# Altium PCB bwl1.22.PcbDoc
Units mil, origin at the board's own origin, x right, y up, seen from the top; angles counter-clockwise.
Board outline 1984.5 x 4223.42 mil, 2 copper layers (Top Layer, Bottom Layer); 109 components, 70 nets, 405 pads, 74 vias.
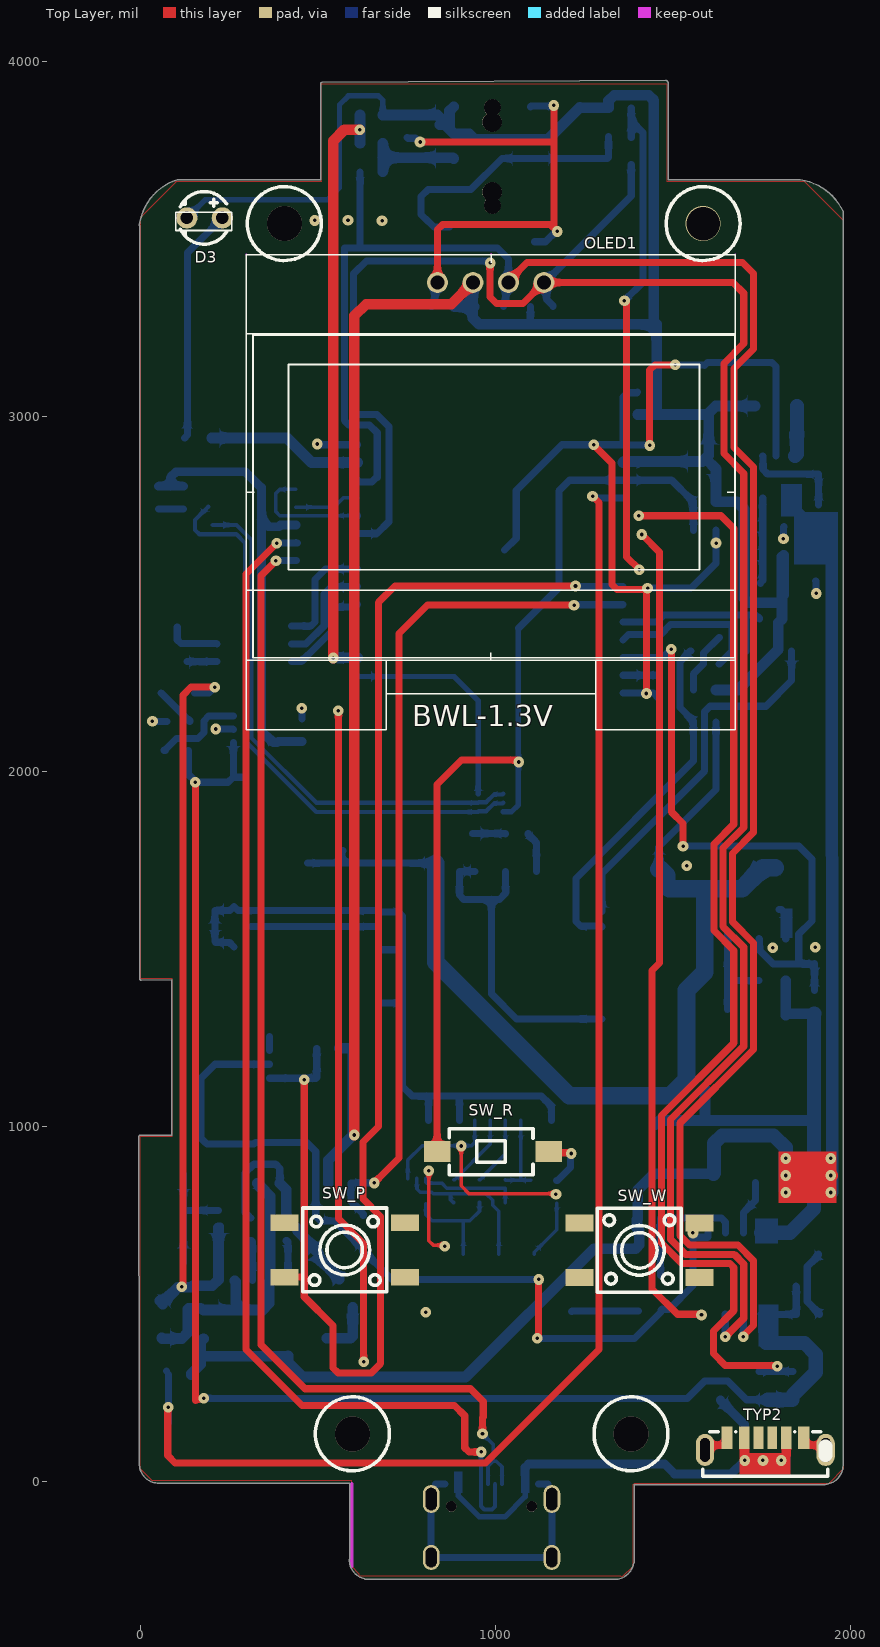
[diagram p0: Top Layer view]
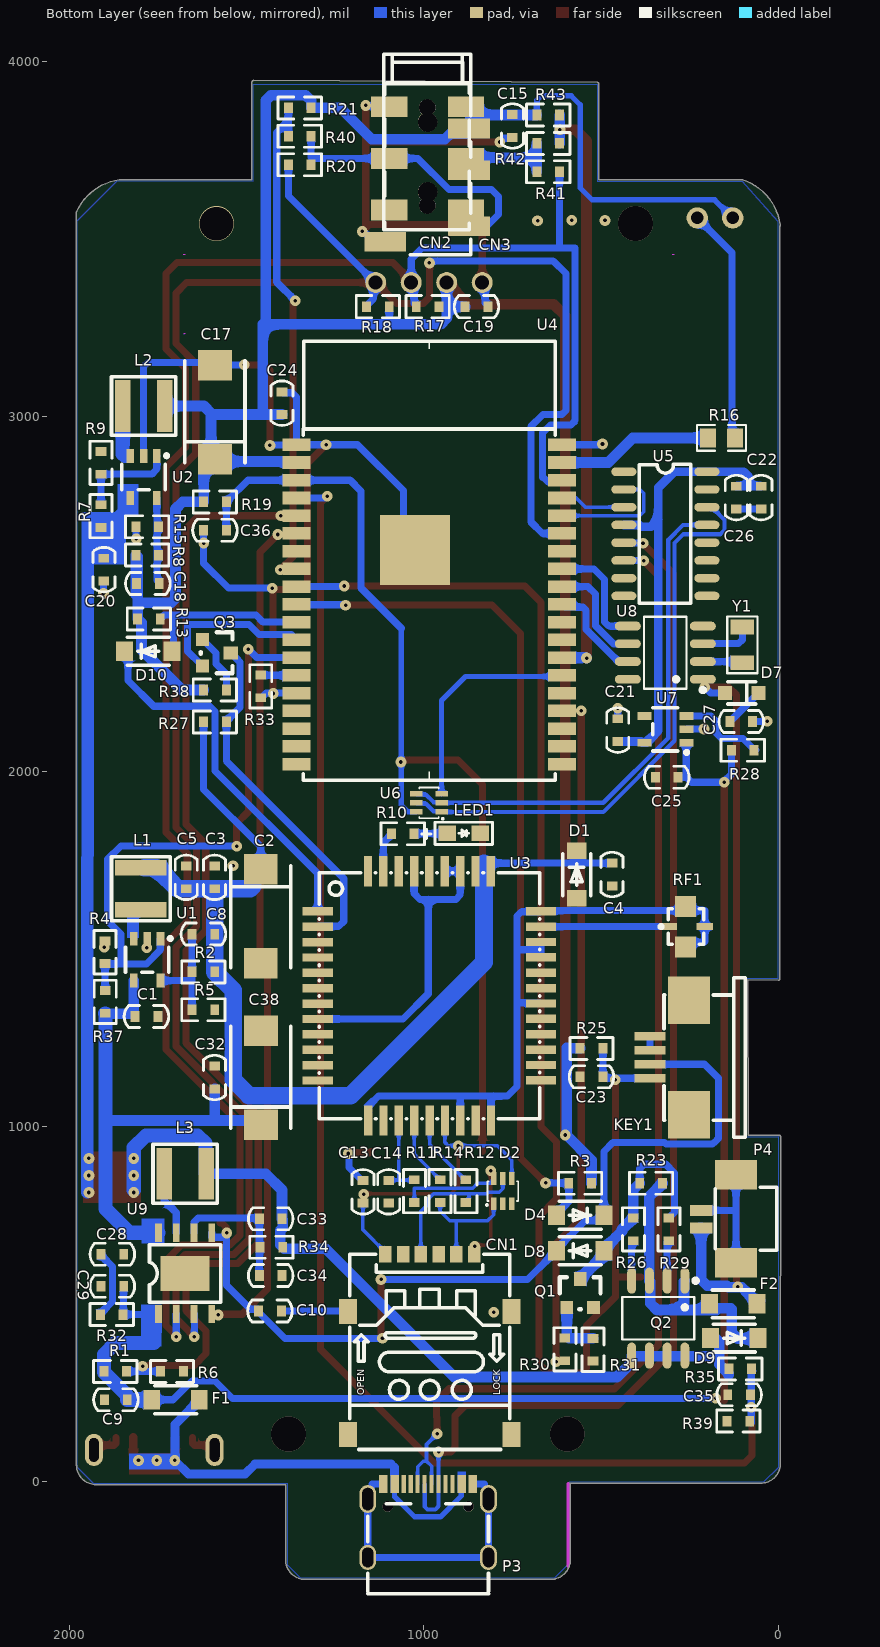
[diagram p1: Bottom Layer view, seen from below]

## Layer stack, top to bottom
Top Solder: solder mask 0.4, Solder Resist, Dk 3.5
Top Layer: signal copper 1.4
Dielectric 1: dielectric 12.6, FR-4, Dk 4.8
Bottom Layer: signal copper 1.4
Bottom Solder: solder mask 0.4, Solder Resist, Dk 3.5

## Board outline
-4.01,50 ccw(c51,50) 51,-5.01 171,-5.01 ccw(c171,0) 171.69,-4.97 588.55,-4.97 588.55,-218.68 ccw(c593,-221) 587.98,-221 ccw(c643,-221) 588.55,-228.88 588.55,-230.57 ccw(c593.57,-230.57) 589.39,-233.34 ccw(c643,-221) 630.48,-274.57 ccw(c633.94,-270.94) 633.94,-275.95 640.37,-275.95 ccw(c643,-221) 643,-276.01 ccw(c643,-271) 643.79,-275.95 1334.21,-275.95 ccw(c1335,-271) 1335,-276.02 ccw(c1335,-221) 1337.63,-275.95 1342.06,-275.95 ccw(c1342.06,-270.94) 1344.81,-275.13 ccw(c1335,-221) 1389.14,-230.78 ccw(c1384.91,-228.09) 1389.92,-228.09 1389.92,-224.22 ccw(c1335,-221) 1390.01,-221 ccw(c1385,-221) 1389.92,-220.03 1389.92,-8.94 1923.11,-8.94 ccw(c1924,-4) 1924,-9.02 ccw(c1924,46) 1978.99,44.29 ccw(c1974.47,46.47) 1979.49,46.47 1979.49,3575.93 ccw(c1974.47,3575.93) 1979.03,3578.02 ccw(c1838.18,3513.34) 1858.69,3666.97 ccw(c1858,3662) 1858,3667.02 1486.01,3667.02 1486.01,3940 ccw(c1481,3940) 1484.89,3943.17 ccw(c1479.93,3942.39) 1479.9,3947.41 511.99,3942.02 511.97,3942.01 511.99,3942.02 ccw(c512,3937) 506.99,3937 506.99,3668.02 104.78,3668.02 ccw(c104.78,3663) 103.23,3667.77 cw(c150,3520) 103.27,3667.78 103.23,3667.77 ccw(c150,3520) -3.63,3540.48 ccw(c1.34,3539.82) -3.02,3537.33 -3.01,1417 ccw(c2,1417) 2.11,1411.99 87.97,1413.87 86.99,975.61 1.98,975.61 ccw(c0,971) -5.01,970.99 -4.01,185.74

## Design rules (kind name [scope] priority, off if disabled: settings)
Clearance [All] p1: gap=6 ignorepadtopadclearanceinfootprint=FALSE
MinimumSolderMaskSliver [All] p1 off: minsoldermaskwidth=2
PolygonConnect [All] p1: connectstyle=Relief reliefconductorwidth=10 reliefentries=4 polygonreliefangle="90 Angle" airgapwidth=10
RoutingVias [All] p1: holewidth=28 width=50 viastyle="Through Hole" minholewidth=28 minwidth=50 maxholewidth=28 maxwidth=50
SilkToSilkClearance [All] p1 off: silktosilkclearance=0
SilkToSolderMaskClearance [IsPad] p1 off: minsilkscreentomaskgap=10 clearancetoexposedcopper=TRUE
SolderMaskExpansion [All] p1: expansion=4
Width [All] p1: maxlimit=100 minlimit=10 preferedwidth=10
27 further rules are at their usual default settings.

## Components (designator, comment, footprint, x,y, rotation, side; value= is the part's Value field where it differs from the comment)
C1 "22uf/6.3V" CAP-SMD-0603 1814,1310 r180 bottom value=22UF
C2 "107" D7343电容 1460,1725 r270 bottom value=1000uF
C3 "10uf" CAP-SMD-0603 1590,1734 r270 bottom
C4 "33p" CAP-SMD-0603 470,1678 r90 bottom
C5 "10pf" CAP-SMD-0603 1670,1734 r270 bottom
C8 "47pf" CAP-SMD-0603 1653.54,1542 r180 bottom
C9 "10uf" CAP-SMD-0603 1900,230 r180 bottom
C10 "100nf" CAP-SMD-0603 1402,480 r0 bottom
C13 "100nf" CAP-SMD-0603 1172,848 r270 bottom
C14 "22P" CAP-SMD-0603 1099.5,784 r90 bottom
C15 "100nf" CAP-SMD-0603 751,3787 r90 bottom
C17 "477" D7343电容 1588.65,2880 r90 bottom
C18 "47pf" CAP-SMD-0603 1746,2530 r0 bottom
C19 "100nf" CAP-SMD-0603 820,3310 r0 bottom
C20 "22uf/6.3V" CAP-SMD-0603 1902,2601 r270 bottom value=22UF
C21 "10uf" CAP-SMD-0603 454,2085 r90 bottom
C22 "10uf" CAP-SMD-0603 50,2804 r270 bottom
C23 "100nf" CAP-SMD-0603 560,1140 r180 bottom
C24 "104" CAP-SMD-0603 1400,3006 r90 bottom
C25 "100nf" CAP-SMD-0603 284,1984 r0 bottom
C26 "100nf" CAP-SMD-0603 120,2804 r270 bottom
C27 "1uf" CAP-SMD-0603 138,2141 r180 bottom
C28 "10uf" CAP-SMD-0603 1910.16,640 r180 bottom
C29 "10uf" CAP-SMD-0603 1846.16,550 r0 bottom
C32 "104" CAP-SMD-0603 1590,1106 r90 bottom
C33 "10uf" CAP-SMD-0603 1464,740 r180 bottom
C34 "10uf" CAP-SMD-0603 1400,580 r0 bottom
C35 "100nf" CAP-SMD-0603 80,244 r0 bottom
C36 "1UF" CAP-SMD-0603 1621,2680 r180 bottom
C38 "Cap Pol1" D7343电容 1459.29,1005 r90 bottom value=1000uf/6v
CN1 "NANO SIM 6PIN" "SIM-SMD_C77877 - DUPLICATE" 984,386 r90 bottom locked
CN2 "PJ-320D" AUDIO-SMD_PJ-320D 991,3652.5 r180 bottom
CN3 "PJ-242" AUDIO-SMD_PJ-242 990,3727.64 r180 bottom
D1 "5.1V 500MW" SOD-123(4148) 570,1710 r270 bottom
D2 "SMF05CT1G" SOT-363_L2.0-W1.3-P0.65-LS2.1-TL 778,818 r90 bottom
D3 "LED0" LED-TH_BD3.8-P2.54-RD 180,3560 r0 top
D4 "1N5817W" SOD-123(4148) 560,750 r0 bottom
D7 "1N4148" SOD323(IN4148) 57,2222 r0 bottom
D8 "1N5817W" SOD-123(4148) 560,650 r180 bottom
D9 "1N5817W" SOD-123(4148) 126,404 r0 bottom
D10 "Diode 1N4148" SOD-123(4148) 1777,2339 r180 bottom
F1 "2A FUSE" SOD-123 1700,230 r0 bottom
F2 "2A FUSE" SOD-123 129,500 r180 bottom
KEY1 "Header 6" FPC-SMD_4P-P1.00_AFA07-S04ECC-00 308,1195 r90 bottom locked
L1 "2.2uH dcr<0.1R-2A 4*4" IND-SMD_L4*4 1797.87,1670 r90 bottom value=2.2uH
L2 "2.2uH dcr<0.1R-2A 4*4" IND-SMD_L4*4 1790,3030 r180 bottom value=2.2uH
L3 "1uH   4*4" IND-SMD_L4*4 1673,867 r180 bottom value=1uH
LED1 "LED0" LED 888,1826 r0 bottom
OLED1 "1.3寸" OLED-2.1 836,3378 r0 top locked
P3 "TYPE-C-31-M-12" USB-C_SMD-TYPE-C-31-M-12 988.38,-110.92 r180 bottom locked
P4 "电池" CONN-SMD_2P-P1.25_X9821WRS-02-9TSN 170,740 r90 bottom
Q1 "S8050" SOT-23-BAT54C 597.5,490 r180 bottom
Q2 "IRF7304QTR" SOP-8_L4.9-W3.9-P1.27-LS6.0-BL 340,460 r0 bottom
Q3 "S8050" SOT-23-BAT54C 1624.3,2372.3 r270 bottom
R1 "10k" RES-SMD-0603 1870,310 r0 bottom
R2 "560k" RES-SMD-0603 1621.54,1435.58 r0 bottom
R3 "10k" RES-SMD-0603 560,840 r180 bottom
R4 "47K" RES-SMD-0603 1899,1491 r90 bottom
R5 "100K/NC" RES-SMD-0603 1621.54,1329.16 r180 bottom value=100K_1%
R6 "10k" RES-SMD-0603 1710,310 r180 bottom
R7 "100K" RES-SMD-0603 1910,2720 r90 bottom value=47K
R8 "680k" RES-SMD-0603 1780,2610 r180 bottom value=680K
R9 "100K/NC" RES-SMD-0603 1910,2870 r90 bottom value=47K
R10 "1k" RES-SMD-0603 1060,1825 r180 bottom
R11 "22R" RES-SMD-0603 1027,817.84 r90 bottom
R12 "22R" RES-SMD-0603 882,817.84 r270 bottom
R13 "470" RES-SMD-0603 1775,2430 r180 bottom
R14 "22R" RES-SMD-0603 954.5,817.84 r270 bottom
R15 "150K" RES-SMD-0603 1780,2690 r0 bottom value=150k
R16 "660" R0805 161.96,2940 r180 bottom
R17 "4.7K" RES-SMD-0603 990,3310 r180 bottom
R18 "4.7K" RES-SMD-0603 1130,3310 r180 bottom
R19 "12K" RES-SMD-0603 1589,2760 r180 bottom
R20 "0" RES-SMD-0603 1350,3710 r180 bottom
R21 "4.7k" RES-SMD-0603 1350,3870 r180 bottom
R23 "5.1k" RES-SMD-0603 360,840 r180 bottom
R25 "51K" RES-SMD-0603 528,1220 r0 bottom
R26 "5.1K" RES-SMD-0603 410,710 r90 bottom value=5.1k
R27 "470" RES-SMD-0603 1589,2140 r0 bottom
R28 "10k" RES-SMD-0603 102,2060 r180 bottom
R29 "5.1K" RES-SMD-0603 310,710 r90 bottom value=5.1k
R30 "1k" RES-SMD-0603 603,372 r270 bottom
R31 "10k" RES-SMD-0603 524,371 r90 bottom
R32 "2R" RES-SMD-0603 1880,470 r180 bottom value=2
R33 "12K" RES-SMD-0603 1460,2240 r90 bottom
R34 "2R" RES-SMD-0603 1430.16,660 r180 bottom
R35 "100k" RES-SMD-0603 109,317 r0 bottom
R37 "47K" RES-SMD-0603 1898,1351 r90 bottom
R38 "470" RES-SMD-0603 1589,2230 r0 bottom
R39 "100k" RES-SMD-0603 114,170 r180 bottom
R40 "0" RES-SMD-0603 1350,3790 r180 bottom
R41 "0" RES-SMD-0603 650,3690 r0 bottom
R42 "0" RES-SMD-0603 650,3770 r0 bottom
R43 "4.7k" RES-SMD-0603 650,3850 r0 bottom
RF1 "BWIPX-3-001E" IPEX-SMD_BWIPX-3-001E 260,1563 r270 bottom
SW_P "TS-1095PS-A3B3-C3D2" KEY-SMD_4P-L6.0-W6.0-P3.90-LS9.0 574.71,652.23 r180 top locked
SW_R "TS-1101-C-W" SW-SMD_L6.0-W3.3-LS8.0 992.52,930 r0 top locked
SW_W "TS-1095PS-A3B3-C3D2" KEY-SMD_4P-L6.0-W6.0-P3.90-LS9.0 1405,651 r0 top locked
TYP2 "type-c-s" TYPE-C-SMD_TYPE-C-31-D-05 1760,106 r180 top locked
U1 "SY8089AAAC" SOT-23-5-2 1780,1470 r90 bottom
U2 "SY8089AAAC" SOT-23-5-2 1790,2830 r90 bottom
U3 "SIM800C 24Mbit" COMM-SMD_42P-L15.7-W17.6-P1.10 985,1368 r180 bottom locked
U4 "ESP32-WROVER-E(16MB)" WIFIM-SMD_39P-L31.4-W18.0-P1.27 984.98,2471 r180 bottom locked
U5 "CH340C" SOIC-16_L9.9-W3.9-P1.27-LS6.0-TL 320,2670 r180 bottom
U6 "UMH3N" SOT-363_L2.0-W1.3-P0.65-LS2.1-TL 986,1912 r0 bottom
U7 "ME6211c33m5g-n" SOT-23-5-2 320,2119 r180 bottom
U8 "DS1302Z+" SOP-8_L4.9-W3.9-P1.27-LS6.0-BL 320,2335 r90 bottom
U9 "IP5306-I2C" ESOP-8 1673,586 r180 bottom
Y1 "32.768K" OSC-SMD_L3.2-W1.5 103,2357 r90 bottom

## Footprints (in the part's own frame and the unit in brackets; to place one, negate y for a bottom-side part, rotate by r counter-clockwise, add the part's x,y. Pads: shape width x height; smd on the part's side, far side on the other; paste and mask are expansions set on the pad)
AUDIO-SMD_PJ-242 [mm]
  rect 2.6x1.5 smd: 2(2.75,3.7) 3(-2.75,3.7) 4(2.75,0) 5(2.75,-3.7) 6(-2.75,0) 7(-2.75,-3.7)
  round 1.4 hole 1.4 unplated: ""(0,-2.4) ""(0,2.6)
  silkscreen extent -3.05,-5.1 3,6.9
AUDIO-SMD_PJ-320D [mm]
  rect 3x1.4 smd: 1(-3,-4.05) 2(3,4.05) 3(3,1.05) 4(3,-2.95)
  round 1.2 hole 1.2 unplated: ""(0,-1.45) ""(0,5.55)
  silkscreen extent -3.12,-4.98 3.13,9.37
CAP-SMD-0603 [mil]
  rect 25x30 smd: 1(0,0) 2(64,0)
  silkscreen extent -31,-31 95,31, body extent 0,-15 63,16, height 18
COMM-SMD_42P-L15.7-W17.6-P1.10 [mil]
  rect 85x23.6 smd: 1(-314.5,238) 2(-314.5,194.7) 3(-314.5,151.4) 4(-314.5,108.1) 5(-314.5,64.8) 6(-314.5,21.5) 7(-314.5,-21.8) 8(-314.5,-65.1) 9(-314.5,-108.5) 10(-314.5,-151.8) 11(-314.5,-195.1) 12(-314.5,-238.4) 22(314.5,-238) 23(314.5,-194.7) 24(314.5,-151.4) 25(314.5,-108.1) 26(314.5,-64.8) 27(314.5,-21.4) 28(314.5,21.9) 29(314.5,65.2) 30(314.5,108.5) 31(314.5,151.8) 32(314.5,195.1) 33(314.5,238.4)
  rect 23.6x85 smd: 13(-172.5,-351) 14(-129.2,-351) 15(-85.9,-351) 16(-42.6,-351) 17(0.7,-351) 18(44,-351) 19(87.3,-351) 20(130.6,-351) 21(173.9,-351) 34(173.5,351) 35(130.2,351) 36(86.9,351) 37(43.6,351) 38(0.3,351) 39(-43,351) 40(-86.3,351) 41(-129.6,351) 42(-172.9,351)
  silkscreen extent -310,-346 312,347
CONN-SMD_2P-P1.25_X9821WRS-02-9TSN [mm]
  rect 0.8x1.6 smd: 1(-0.65,1.25) 2(0.6,1.25)
  rect 2.1x3 smd: 3(3.15,-1.25) 4(-3.15,-1.25)
  silkscreen extent -2.25,-4.18 2.25,0.22, body extent -3.55,-4.23 3.65,0.28, height 4
D7343电容 [mm]
  rect 2.16x2.41 smd: 1(0,0) 2(6.731,0)
  silkscreen extent -0.25,-2.14 7.05,2.16
ESOP-8 [mil]
  rect 18.9x51.18 smd: 1(-75,-114.5) 2(-25,-114.5) 3(25,-114.5) 4(75,-114.5) 5(75,114.5) 6(25,114.5) 7(-25,114.5) 8(-75,114.5)
  rect 137.8x98.42 smd: 9(0,0)
  silkscreen extent -100,-81 100,81, body extent -100,-83 100,79, height 79
FPC-SMD_4P-P1.00_AFA07-S04ECC-00 [mm]
  rect 0.6x2.2 smd: 1(-1.5,1.4) 2(-0.5,1.4) 3(0.499,1.4) 4(1.499,1.4)
  rect 3.4x3 smd: 5(4.1,-1.4) 6(-4.1,-1.4)
  silkscreen extent -5.72,-5.43 5.69,0.4, body extent -5.72,-5.5 5.75,0.43, height 2.5
IND-SMD_L4*4 [mm]
  rect 1.1x3.7 smd: 1(-1.5,0) 2(1.5,0)
  silkscreen extent -2.3,-2.1 2.3,2.1, body extent -2.16,-2.03 2.16,2.03, height 2
IPEX-SMD_BWIPX-3-001E [mm]
  rect 0.5x1.2 smd: 1(-0.005,-1.3) 4(-0.005,1.3)
  rect 1.5x1.5 smd: 2(1.455,-0.07) 3(-1.455,-0.07)
  silkscreen extent -1.27,-1.96 1.27,1.22, body extent -1.31,-1.31 1.3,1.19, height 2
KEY-SMD_4P-L6.0-W6.0-P3.90-LS9.0 [mm]
  rect 2x1.2 smd: 1(-4.3,1.95) 2(4.3,1.95) 3(-4.3,-1.95) 4(4.3,-1.95)
  silkscreen extent -3,-3 3,3
LED [mil]
  rect 49x43 smd: 1(46.26,0) 2(-46.26,0)
  silkscreen extent -81,-31 118,31, body extent -46,-22 47,22, height 39
LED-TH_BD3.8-P2.54-RD [mil]
  round 60 hole 35.43: 1(-50,0) 2(50,0)
  silkscreen extent -68,-74 63,74
OLED-2.1 [mm]
  round 1.5 hole 1: 1(0,0) 2(2.54,0) 3(5.08,0) 4(7.62,0)
  silkscreen extent -13.68,-32 21.32,2, body extent -13.69,-31.99 21.36,2.05, height 2.7
OSC-SMD_L3.2-W1.5 [mm]
  rect 1.05x1.7 smd: 1(-1.275,0) 2(1.275,0)
  silkscreen extent -2.03,-1.08 2.03,1.08
R0805 [mil]
  rect 44.59x54.21 smd: 1(-38.04,0) 2(38.04,0)
  silkscreen extent -69,-36 69,36
RES-SMD-0603 [mil]
  rect 25x30 smd: 1(-32,0) 2(32,0)
  silkscreen extent -61,-31 61,31, body extent -50,-20 52,19, height 21
"SIM-SMD_C77877 - DUPLICATE" [mm]
  rect 1.8x1.3 smd: 0(-6.451,-5.853) 0(-6.451,5.853) 0(2.349,-5.853) 0(2.349,5.853)
  rect 1.2x0.9 smd: C1(6.451,3.173) C2(6.451,0.633) C3(6.451,-1.907) C5(6.451,1.903) C6(6.451,-0.637) C7(6.451,-3.177)
  silkscreen extent -7.52,-5.71 6.45,5.71, body extent -7.52,-5.75 6.45,5.75, height 1
SOD323(IN4148) [mm]
  rect 1x1 smd: 1(0,0) 2(2.4,0)
  silkscreen extent 0.2,-0.8 2.2,0.8, body extent -0.06,-0.76 2.35,0.76, height 1
SOD-123 [mm]
  rect 1.2x1.4 smd: 1(-1.7,0) 2(1.7,0)
  silkscreen extent -1.5,-1 1.5,1, body extent -1.68,-1 1.73,1.02, height 1.5
SOD-123(4148) [mm]
  rect 1.2x1.4 smd: 1(-1.7,0) 2(1.7,0)
  silkscreen extent -1.5,-1 1.5,1, body extent -1.68,-1 1.73,1.02, height 1.5
SOIC-16_L9.9-W3.9-P1.27-LS6.0-TL [mm]
  oval 1.8x0.6 smd: 1(-2.972,4.445) 2(-2.972,3.175) 3(-2.972,1.905) 4(-2.972,0.635) 5(-2.972,-0.635) 6(-2.972,-1.905) 7(-2.972,-3.175) 8(-2.972,-4.445) 9(2.972,-4.445) 10(2.972,-3.175) 11(2.972,-1.905) 12(2.972,-0.635) 13(2.972,0.635) 14(2.972,1.905) 15(2.972,3.175) 16(2.972,4.445)
  silkscreen extent -1.85,-4.98 1.83,4.98
SOP-8_L4.9-W3.9-P1.27-LS6.0-BL [mm]
  oval 0.63x1.865 smd: 1(-1.905,-2.682) 2(-0.635,-2.682) 3(0.635,-2.682) 4(1.905,-2.682) 5(1.905,2.682) 6(0.635,2.682) 7(-0.635,2.682) 8(-1.905,2.682)
  silkscreen extent -2.82,-2.83 2.58,1.52
SOT-23-5-2 [mm]
  rect 1x0.55 smd: 1(1.5,-0.95) 2(1.5,0) 3(1.5,0.95) 4(-1.5,0.95) 5(-1.5,-0.95)
  silkscreen extent -0.9,-1.78 1.65,1.55, body extent -1.46,-1.6 1.59,1.58, height 1
SOT-23-BAT54C [mil]
  rect 36x36 smd: 1(0,0) 2(75,0)
  rect 36x40 smd: 3(38,80)
  silkscreen extent -20,-5 95,85, body extent -20,3 95,71, height 39
SOT-363_L2.0-W1.3-P0.65-LS2.1-TL [mm]
  rect 0.9x0.4 smd: 1(-0.9,0.65) 2(-0.9,0) 3(-0.9,-0.65) 4(0.9,-0.65) 5(0.9,0) 6(0.9,0.65)
  silkscreen extent -1.06,-1.1 0.7,1.21, body extent -0.9,-1.12 0.95,1.13, height 1
SW-SMD_L6.0-W3.3-LS8.0 [mm]
  rect 1.9x1.5 smd: 1(-4,0) 2(4,0)
  silkscreen extent -3.14,-1.67 2.86,1.63
TYPE-C-SMD_TYPE-C-31-D-05 [mm]
  oval 1.3x2.3 hole 0.7 slot 1.7 at 90 deg: 7(4.32,0.44) 8(-4.32,0.44)
  rect 0.7x1.6 smd: A5(-0.5,-0.44) B5(0.5,-0.44)
  rect 0.76x1.6 smd: A9(1.502,-0.44) B9(-1.502,-0.44)
  rect 0.8x1.6 smd: A12(2.75,-0.44) B12(-2.75,-0.44)
  silkscreen extent -4.47,-0.87 4.47,2.31
USB-C_SMD-TYPE-C-31-M-12 [mm]
  oval 1.2x1.8 hole 0.8 slot 1.4 at 90 deg: 0(-4.32,-2.624) 0(4.32,-2.624)
  oval 1.2x2 hole 0.8 slot 1.6 at 90 deg: 0(-4.32,1.556) 0(4.32,1.556)
  rect 0.3x1.3 smd: A1(-3.35,2.623) A4(-2.55,2.623) A5(-1.25,2.623) A6(-0.25,2.623) A7(0.25,2.623) A8(1.25,2.624) A9(2.55,2.623) A12(3.35,2.623) B1(3.05,2.623) B4(2.25,2.623) B5(1.75,2.623) B6(0.75,2.623) B7(-0.75,2.623) B8(-1.75,2.624) B9(-2.25,2.623) B12(-3.05,2.623)
  round 0.75 hole 0.75 unplated: ""(-2.89,1.026) ""(2.89,1.026)
  silkscreen extent -4.32,-5.23 4.32,1.22
WIFIM-SMD_39P-L31.4-W18.0-P1.27 [mm]
  rect 2x0.9 smd: 1(-9.5,11.43) 2(-9.5,10.16) 3(-9.5,8.89) 4(-9.5,7.62) 5(-9.5,6.35) 6(-9.5,5.08) 7(-9.5,3.81) 8(-9.5,2.54) 9(-9.5,1.27) 10(-9.5,0) 11(-9.5,-1.27) 12(-9.5,-2.54) 13(-9.5,-3.81) 14(-9.5,-5.08) 15(-9.5,-6.35) 16(-9.5,-7.62) 17(-9.5,-8.89) 18(-9.5,-10.16) 19(-9.5,-11.43) 20(9.5,-11.43) 21(9.5,-10.16) 22(9.5,-8.89) 23(9.5,-7.62) 24(9.5,-6.35) 25(9.5,-5.08) 26(9.5,-3.81) 27(9.5,-2.54) 28(9.5,-1.27) 29(9.5,0) 30(9.5,1.27) 31(9.5,2.54) 32(9.5,3.81) 33(9.5,5.08) 34(9.5,6.35) 35(9.5,7.62) 36(9.5,8.89) 37(9.5,10.16) 38(9.5,11.43)
  rect 5x5 smd: 39(-1.017,3.887)
  silkscreen extent -9.02,-12.6 9.02,18.87, body extent -9.02,-12.57 8.99,18.85, height 2.5

## Part data
C1 C3 C4 C5 C8 C9 C10 C13 C14 C15 C18 C19 C20 C21 C22 C23 C24 C25 C26 C27 C28 C29 C32 C33 C34 C35 C36: library part Cap, "贴片电容", LatestRevisionDate=17-Jul-2002, LatestRevisionNote="Re-released for DXP Platform.", PackageReference=RAD-0.3, Published=8-Jun-2000, Publisher="Altium Limited"
C2: library part "Cap Pol1", "大容量贴片钽电容", LatestRevisionDate=17-Jul-2002, LatestRevisionNote="Re-released for DXP Platform.", PackageReference=RB7.6-15, Published=8-Jun-2000, Publisher="Altium Limited"
C17: library part "Cap Pol1", "贴片电解电容", LatestRevisionDate=17-Jul-2002, LatestRevisionNote="Re-released for DXP Platform.", PackageReference=RB7.6-15, Published=8-Jun-2000, Publisher="Altium Limited"
C38: "贴片电解电容", LatestRevisionDate=17-Jul-2002, LatestRevisionNote="Re-released for DXP Platform.", PackageReference=RB7.6-15, Published=8-Jun-2000, Publisher="Altium Limited"
CN1: library part nano1.4_c77877, "SIM 卡座", BOM_Manufacturer="Boom Precision Elec", BOM_Manufacturer Part=-, BOM_Supplier=LCSC, BOM_Supplier Part=C77877, spicePre=C, spiceSymbolName=nano1.4_c77877
CN2: "3.5音频插座", BOM_JLCPCB Part Class="Extended Part", BOM_Manufacturer="SHOU HAN", BOM_Manufacturer Part=PJ-320D, BOM_Supplier=LCSC, BOM_Supplier Part=C431535, Contributor=LCSC, spicePre=C, spiceSymbolName=PJ-320D
CN3: "2.5音频插座", BOM_JLCPCB Part Class="Extended Part", BOM_Manufacturer="SHOU HAN", BOM_Manufacturer Part=PJ-242, BOM_Supplier=LCSC, BOM_Supplier Part=C431536, Contributor=LCSC, spicePre=C, spiceSymbolName=PJ-242
D1: library part "Diode 1N4148", "贴片稳压二极管", Code_JEDEC=DO-204-AH, ComponentLink1Description="Manufacturer Link", ComponentLink1URL=http://www.fairchildsemi.com/, ComponentLink2Description=Datasheet, ComponentLink2URL=http://www.fairchildsemi.com/ds/1N%2F1N4148.pdf, DatasheetDocument=1997, LatestRevisionDate=17-Jul-2002, LatestRevisionNote="Re-released for DXP Platform.", PackageReference=DO-35, Published=8-Jun-2000, Publisher="Altium Limited"
D2: library part SMF05C_C558425, "集成电路", BOM_Manufacturer="TECH PUBLIC", BOM_Manufacturer Part=SMF05C, BOM_Supplier=LCSC, BOM_Supplier Part=C558425, Contributor=LCSC, spicePre=D, spiceSymbolName=SMF05C_C558425
D3 LED1: "贴片发光二极管", LatestRevisionDate=08-Jul-2005, LatestRevisionNote="Mech Layer 1 removed.", PackageReference=LED-0, Published=8-Jun-2000, Publisher="Altium Limited"
D4 D8 D9: "肖特基二极管", BOM_JLCPCB Part Class="Extended Part", BOM_Manufacturer=TWGMC, BOM_Manufacturer Part=1N5817W, BOM_Supplier=LCSC, BOM_Supplier Part=C727113, Contributor=LCSC, spicePre=D, spiceSymbolName=1N5817W
D7: library part "Diode 1N4148", "IN4148", Code_JEDEC=DO-204-AH, ComponentLink1Description="Manufacturer Link", ComponentLink1URL=http://www.fairchildsemi.com/, ComponentLink2Description=Datasheet, ComponentLink2URL=http://www.fairchildsemi.com/ds/1N%2F1N4148.pdf, DatasheetDocument=1997, LatestRevisionDate=17-Jul-2002, LatestRevisionNote="Re-released for DXP Platform.", PackageReference=DO-35, Published=8-Jun-2000, Publisher="Altium Limited"
D10: "贴片二极管", Code_JEDEC=DO-204-AH, ComponentLink1Description="Manufacturer Link", ComponentLink1URL=http://www.fairchildsemi.com/, ComponentLink2Description=Datasheet, ComponentLink2URL=http://www.fairchildsemi.com/ds/1N%2F1N4148.pdf, DatasheetDocument=1997, LatestRevisionDate=17-Jul-2002, LatestRevisionNote="Re-released for DXP Platform.", PackageReference=DO-35, Published=8-Jun-2000, Publisher="Altium Limited"
F1 F2: library part "Fuse 2", "恢复保险", LatestRevisionDate=17-Jul-2002, LatestRevisionNote="Re-released for DXP Platform.", PackageReference=PIN-W2/E2.8, Published=8-Jun-2000, Publisher="Altium Limited"
KEY1: "Header, 6-Pin", LatestRevisionDate=17-Jul-2002, LatestRevisionNote="Re-released for DXP Platform.", Publisher="Altium Limited"
L1 L2 L3: library part "Inductor Iron", "贴片电感器", LatestRevisionDate=17-Jul-2002, LatestRevisionNote="Re-released for DXP Platform.", PackageReference=AXIAL-0.9, Published=24-Mar-1999, Publisher="Altium Limited"
OLED1: library part "Header 4", "OLED模块", LatestRevisionDate=17-Jul-2002, LatestRevisionNote="Re-released for DXP Platform.", Publisher="Altium Limited"
P3: "16 PIN Type-c", BOM_Manufacturer="Rectangular Connectors - Contacts", BOM_Manufacturer Part=TYPE-C-31-M-12, BOM_Paste Type=expand, BOM_Supplier=LCSC, BOM_Supplier Part=C165948, Contributor=LCSC, spicePre=U, spiceSymbolName=TYPE-C-31-M-12
P4: library part "Header 4", "Header, 4-Pin", LatestRevisionDate=17-Jul-2002, LatestRevisionNote="Re-released for DXP Platform.", Publisher="Altium Limited"
Q1 Q3: library part SEBT8050, "贴片三极管", BOM_JLCPCB Part Class="Extended Part", BOM_Manufacturer=SINO-IC, BOM_Manufacturer Part=SEBT8050, BOM_Supplier=LCSC, BOM_Supplier Part=C393132, Contributor=LCSC, spicePre=Q, spiceSymbolName=SEBT8050
Q2: "贴片场效管", BOM_JLCPCB Part Class="Extended Part", BOM_Manufacturer="VBsemi Elec", BOM_Manufacturer Part=IRF7304QTR, BOM_Supplier=LCSC, BOM_Supplier Part=C879032, Contributor=LCSC, spicePre=Q, spiceSymbolName=IRF7304QTR
R1 R2 R3 R4 R5 R6 R7 R8 R9 R10 R11 R12 R13 R14 R15 R16 R17 R18 R19 R20 R21 R23 R25 R26 R27 R28 R29 R30 R31 R32 R33 R34 R35 R37 R38 R39 R40 R41 R42 R43: library part Res2, "贴片电阻", LatestRevisionDate=17-Jul-2002, LatestRevisionNote="Re-released for DXP Platform.", PackageReference=AXIAL-0.4, Published=8-Jun-2000, Publisher="Altium Limited"
RF1: "RF同轴连接器", BOM_Manufacturer="BAT WIRELESS", BOM_Manufacturer Part=BWIPX-3-001E, BOM_Supplier=LCSC, BOM_Supplier Part=C784400, Contributor=LCSC, spicePre=R, spiceSymbolName=BWIPX-3-001E
SW_P SW_W: "按键开关，6*6*6", BOM_JLCPCB Part Class="Extended Part", BOM_Manufacturer=Yuandi(台湾元迪), BOM_Manufacturer Part=TS-1095PS-A3B3-C3D2, BOM_Supplier=LCSC, BOM_Supplier Part=C2834943, Contributor=LCSC, spicePre=S, spiceSymbolName=TS-1095PS-A3B3-C3D2
SW_R: "轻触开关 6*3.6*0.6", BOM_JLCPCB Part Class="Extended Part", BOM_Manufacturer="XKB Connectivity(中国星坤)", BOM_Manufacturer Part=TS-1101-C-W, BOM_Supplier=LCSC, BOM_Supplier Part=C318938, Contributor=LCSC, spicePre=S, spiceSymbolName=TS-1101-C-W
TYP2: library part "Header 8", "TYPE-C 立式", LatestRevisionDate=17-Jul-2002, LatestRevisionNote="Re-released for DXP Platform.", Publisher="Altium Limited"
U1 U2: library part SY8089, "DC-DCоƬ"
U3: library part SIM800C32, "GSM模块", BOM_Manufacturer=SIMCOM, BOM_Manufacturer Part=SIM800C32, BOM_Supplier=LCSC, BOM_Supplier Part=C69120, spicePre=U, spiceSymbolName=SIM800C32
U4: library part ESP32-WROVER-E(16MB)_1, "集成电路", BOM_Manufacturer="Espressif Systems", BOM_Manufacturer Part=ESP32-WROVER-E(16MB), BOM_Supplier=LCSC, BOM_Supplier Part=C529589, Contributor=LCSC, spicePre=U, spiceSymbolName=ESP32-WROVER-E(16MB)
U5: "u转串", BOM_Manufacturer=WCH, BOM_Manufacturer Part=CH340C, BOM_Paste Type=recommend, BOM_Supplier=LCSC, BOM_Supplier Part=C84681, spicePre=U, spiceSymbolName=CH340C
U6: library part UMH3N_1, "双数字晶体管", BOM_LCSC Assembly=Yes, BOM_Manufacturer=CJ, BOM_Manufacturer Part=UMH3N, BOM_Supplier=LCSC, BOM_Supplier Part=C62892, image=//image.lceda.cn/szlcsc/C62892.jpg, SMT Type=Extend, spicePre=Q, spiceSymbolName=UMH3N
U7: library part ME6211, "LDO_低压差线性稳压"
U8: library part DS1302, "时钟芯片"
U9: "集成电路"
Y1: library part XTAL, "晶振", LatestRevisionDate=17-Jul-2002, LatestRevisionNote="Re-released for DXP Platform.", PackageReference=R38, Published=8-Jun-2000, Publisher="Altium Limited"

## Via types
v1: diameter 30, hole 10, Top Layer to Bottom Layer, 70 vias
v2: diameter 98.43, hole 98.43, Top Layer to Bottom Layer, 3 vias
v3: diameter 98.43, hole 94.49, Top Layer to Bottom Layer, 1 vias

## Nets (pads, with @x,y where several pads share a name; then routed paths per layer and width w, separated by ;. In a path a pad name is that pad's centre, name@x,y a point inside that pad or via, vN(x,y) a via of type N, cw(c..) or ccw(c..) an arc to the next point about the centre after c; other vN are vias at no path point)
5V: C9.2 C25.1 C29.1 F1.2 R1.2 R28.1 R32.2 U7.1 U9.1 | length 4363.8
  Top Layer w20: v1(154,1970) 154,234 154,228 v1@168,232
  Bottom Layer w20: R28.1 134,1992.71 154,1972.71 v1(154,1970) 245.9,1970 260.95,1985.05 ; v1(178,234) 1540,234 1589,283 1653.88,283 1706.88,230 F1.2 ; U7.1 260.95,1985.05 ; C25.1 262,1984 260.95,1985.05 ; U9.1 1748,471.3 U9.1@1748.55,470.75 ; 1761.72,390 1750,401.72 1750,420 1748.55,421.45 U9.1@1748.55,470.75 ; C9.2 1838.5,232.5 C9.2@1838.5,244 ; C29.1 1847.08,549.08 1847.08,470.92 R32.2@1847.25,470.75 ; R32.2 R32.2@1847.25,470.75 ; R1.2@1902,307.5 R1.2 ; U9.1@1748.55,470.75 R32.2@1847.25,470.75
  Bottom Layer w40: 1761.72,390 1870,390 1902,358 R1.2 ; F1.2 C9.2 ; C9.2@1838.5,244 R1.2@1902,307.5
5V_jc: R1.1 R6.1 U4.5 | length 3216.3
  Top Layer w20: v1(1403,2721) 1635,2721 1671,2685 1671,1894 1671,1851.5 1615,1795.5 1615,1552.23 1671,1496.23 1671,1234.77 1466.92,1030.69 1466.92,671.54 1524.61,613.85 1660.15,613.85 1671,603 1671,481 1614,424 1614,360 1647,327 1790,327 v1(1793,324)
  Bottom Layer w20: R6.1 R1.1
+5V: C1.1 C32.1 C38.1 R37.1 U1.4 U9.8 | length 1452.3
  Bottom Layer w30: C38.1@1450,1005 1462,1017 1590,1017 ; C32.1 1590,1017 ; U9.8 U9.8@1748,705.54 ; C1.1@1817.4,1313.4 U1.4 ; C1.1@1822,1318 R37.1@1898,1318 ; 1897,1004 1884,1017 1590,1017
  Bottom Layer w40: U9.8 1829.5,700.5 1897,768 1897,1004 1897,1317 R37.1@1898,1318
ADA: CN2.4 CN3.6 R20.2 R40.2 | length 778.3
  Bottom Layer w20: CN2.4@870,3534.41 825.96,3534.41 810.36,3550 810,3550 790,3570 790,3620 810,3640 930,3640 1017.64,3727.64 CN3.6 1315.64,3727.64 1318,3730 R40.2
ASCL: CN2.3 CN3.4 R41.2 R42.2 | length 280.7
  Bottom Layer w30: R41.2 682,3730 ; R42.2 682,3730 ; CN3.4 879.37,3730 682,3730
BAT_VTG: C35.1 R35.1 R39.2 U4.4 | length 4115.3
  Top Layer w20: v1@76,196 76,73 97,52 971.84,52 1291.08,371.24 1291.08,758.02 1291.08,2757.92 v1(1273,2776)
  Bottom Layer w20: R39.2@78,165 78,301 ; v1(1273,2776) 1275.71,2776 1280.71,2771 U4.4
  other v1: 78,209
D+: P3.A6 P3.B6 U5.5 | length 3471.9
  Top Layer w20: v1(383,2643) 296.5,2556.5 296.5,371.5 454,214 884,214 913,185 913,94.72 924.72,83 v1(959,83)
  Bottom Layer w12: v1@958.85,92.15 P3.B6 958.85,-69.85 968,-79 990,-79 998.22,-70.78 P3.A6
  Bottom Layer w20: v1@384.31,2644.31 U5.5@441.31,2644.31 ; U5.5 U5.5@437.69,2645.69
D-: P3.A7 P3.B7 U5.6 | length 3307.8
  Top Layer w20: v1(381,2594) 339,2552 339,2502 339,385 463,261 929,261 965,225 965,181.85 963,179.85 v1(963,134)
  Bottom Layer w10: v1(963,134) 993,104 993,57 ; P3.A7 978.54,42.54 993,57 ; P3.B7 1017.91,41.09 1002,57 993,57
  Bottom Layer w20: v1@382.31,2595.31 U5.6@439.31,2595.31
ds1: R42.1 R43.1 U4.26 | length 1694.6
  Top Layer w30: v1(542,2320) 542,3777 574,3809 v1(617,3809)
  Bottom Layer w30: v1(542,2320) 543,2321 U4.26 ; R42.1 R43.1
ds2: R21.1 R40.1 U4.8 | length 1400.1
  Top Layer w20: v1(1363,3327) 1369,3321 1369,2605 v1(1405,2569)
  Bottom Layer w20: v1(1363,3327) 1415,3379 1415,3801 1382,3834 ; R40.1@1382,3787.5 R40.1 1382,3834 ; R21.1 1382,3834
DS_CE: U4.31 U8.5 | length 321.9
  Bottom Layer w20: U8.5 479.28,2410 491,2421.72 491,2541 521,2571 U4.31
DS_IO: U4.30 U8.6 | length 304.4
  Bottom Layer w20: U8.6 466.05,2360 517,2410.95 517,2500.28 537.72,2521 U4.30
DS_SCLK: U4.29 U8.7 | length 283.6
  Bottom Layer w20: U8.7 452.82,2310 543,2400.18 543,2454 552.28,2463.28 603.25,2463.28 U4.29
DTR: U5.13 U6.2 U6.4 | length 1480.2
  Bottom Layer w12: U5.13 270,2695 312,2653 312,2095 495,1912 U6.2 952.44,1913.88 973.42,1913.88 995.27,1935.72 1019.56,1935.72 U6.4
DVD4V4: C2.1 C3.2 C4.2 C5.2 C8.2 D1.1 L1.2 R2.1 R27.2 U3.34 U3.35 | length 3002.4
  Bottom Layer w20: C4.2 566,1742 ; D1.1 566,1772.93 566,1742 ; 831,1742 566,1742 ; C2.1 1460,1789 1621,1950 R27.2 ; L1.2@1787.65,1729.05 L1.2
  Bottom Layer w50: 831,1742 831,1719 831,1463 1207.2,1086.8 1492.8,1086.8 1537.73,1131.73 1537.73,1383.77 R2.1 C8.2 1589.54,1669.54 C3.2 ; C2.1 1464.92,1725 1482.44,1707.48 1482.44,1676.85 1489.29,1670 C3.2 ; L1.2@1787.65,1729.05 1753.38,1729.05 1694.33,1670 C3.2
ESP_RXD: D10.2 R13.2 U4.11 | length 502
  Bottom Layer w20: U4.11 1453.5,2421 1473.5,2441 1710,2441 ; D10.2@1706,2339 1706,2437 1710,2441 ; R13.2 1743,2432.5 1740.5,2435 1738,2435 1732,2441 1710,2441
ESP_TXD: Q3.2 U4.12 | length 450.7
  Bottom Layer w20: U4.12 1374,2386 1465,2386 1493,2414 1666,2414 1666,2339 Q3.2@1630,2303
GND: C1.2 C2.2 C3.1 C4.1 C5.1 C9.1 C10.1 C13.1 C14.1 C15.1 C17.2 C19.1 C20.2 C21.2 C22.2 C23.1 C24.2 C25.2 C26.2 C27.2 C28.2 C29.2 C32.2 C34.1 C35.2 C36.1 C38.2 CN1.0 CN1.C5 CN2.1 CN3.3 D1.2 D2.2 KEY1.3 KEY1.4 KEY1.5 KEY1.6 LED1.2 OLED1.1 P3.0 P3.A1 P3.A12 P3.B1 P3.B12 Q1.2 R4.2 R5.2 R6.2 R9.2 R15.2 R31.1 R33.1 R39.1 RF1.2 RF1.3 RF1.4 SW_P.4 SW_R.2 SW_W.4 TYP2.7 TYP2.8 TYP2.A12 TYP2.B12 U1.2 U2.2 U3.8 U3.13 U3.19 U3.21 U3.27 U3.30 U3.31 U3.33 U3.36 U3.37 U3.39 U4.1 U4.15 U4.38 U4.39 U5.1 U7.2 U8.4 U9.9 | length 8989.3
  Top Layer w20: v1(787,3774) 1162,3774 1164,3772 ; OLED1.1 836,3527 850,3541 1155,3541 v1(1174,3522) 1174,3524.71 1164,3534.71 1164,3772 ; SW_R.2 1154.09,925.91 1211.09,925.91 v1(1213,924) ; v1(1164,3877) 1164,3772 ; v1(1276,2921) 1328,2869 1328,2527 1342,2513 v1@1419,2513 ; v1(1425,2220) 1425,2507 v1@1419,2513 ; v1(1428,2517) 1423,2517 v1@1419,2513 ; v1(1434,2919) 1434,3131.28 1448.72,3146 v1(1506,3146) ; TYP2.7 1603.09,101.83 1645.99,101.83 1651.74,107.58 TYP2.A12 ; TYP2.B12 1868.27,107.58 1874.02,101.83 1916.91,101.83 TYP2.8
  Bottom Layer w20: v1(33,2142) 33.5,2141.5 73.5,2141.5 C27.2 ; C22.2 C26.2 ; v1(211,2120) 211.5,2119.5 260.45,2119.5 U7.2 ; RF1.2 249.47,1519 211,1519 208.82,1521.18 RF1.4 208.82,1608.57 251.04,1608.57 RF1.3 274.84,1608.2 668.7,1608.2 U3.33 672.3,1604.6 726.28,1604.6 738,1592.88 738,1113 765,1086 804,1086 ; KEY1.3 KEY1.4 ; C21.2 v1(454,2178) ; v1@507,2924 510,2921 U4.38 ; U3.27 672.3,1348.4 736,1348.4 ; U3.30 670.5,1498.15 ; U3.31 670.5,1498.15 ; 726.28,1498 670.65,1498 670.5,1498.15 ; C15.1 753.5,3784.5 773.79,3784.5 784.29,3774 v1(787,3774) ; U3.21 811.1,1078.9 804,1086 ; C19.1 820,3312.5 828.53,3321.03 828.53,3370.53 OLED1.1 ; P3.A12 830.01,-7.64 830.01,-14.83 818.3,-26.55 818.3,-49.67 818.3,-214.24 1158.45,-214.24 1158.45,-49.67 1158.45,-26.55 1146.74,-14.83 1146.74,-7.64 P3.A1 ; U3.19 897.7,1085.7 898,1086 ; U3.37 U3.36 898.1,1651.9 910,1640 988,1640 ; U4.39 1058,2657.01 1058,2792 1187,2921 v1(1276,2921) U4.1 ; U3.39 1028,1657 1011,1640 988,1640 ; CN3.3 1100.11,3875.16 1162.16,3875.16 v1(1164,3877) ; CN2.1 1140.6,3493.05 1167.64,3520.09 1172.09,3520.09 v1(1174,3522) ; U3.13 1157.5,1057.16 1128.66,1086 898,1086 ; C13.1 1174.5,848 1211.09,884.59 1211.09,922.09 v1(1213,924) ; CN1.0@1214.43,478.48 1215.95,480 C10.1 ; U3.8 1059.1,1302.9 988,1374 988,1640 ; U4.15 1444.5,2221 1457.5,2208 R33.1 ; C24.2 1397.5,3067.5 1371.5,3067.5 1359,3055 U4.1 ; v1(1428,2517) 1551,2517 1621,2587 v1(1621,2644) C36.1 ; v1(1434,2919) 1433,2920 1360,2920 U4.1 ; v1(1506,3146) 1587.65,3146 C17.2 1596.65,3153 1778,3153 1790,3141 U2.2 ; v1(1811,2656) 1811.5,2656.5 1811.5,2689.5 R15.2 ; C20.2 1902.5,2536.5 1902.5,2502.5 v1(1903,2502) ; 804,1086 898,1086
  other v1: 803,477 1781,1504 1901,1505 1538,1735 497,2923 680,3552 490,3553 584,3554
GSM_power: R4.1 R37.2 U1.1 U4.13 | length 1687.3
  Top Layer w20: v1(1495,2345) 1495,1887 1528,1854 v1(1528,1790)
  Bottom Layer w20: U4.13 1360,2322 1472,2322 v1(1495,2345) ; v1(1528,1790) 1854.05,1790 1891,1753.05 1891,1579 1854,1542 1854,1467 1863,1458 ; U1.1 1743.42,1528.22 1743.42,1496.58 1782,1458 1863,1458 ; R37.2 1898.5,1383.5 R4.1@1898.5,1458 ; R4.1 1898.5,1458.5 R4.1@1898.5,1458 ; 1863,1458 R4.1@1898.5,1458
GSM_RXD: Q3.3 R27.1 U3.2 | length 1008.7
  Bottom Layer w20: U3.2 1297.7,1564.5 1239.5,1564.5 1226,1578 1226,1699 1557,2030 R27.1 1557,2142.5 1519,2180.5 1519,2309 1540,2330 1540,2332 1548,2340 Q3.3@1550,2340
GSM_TXD: D10.1 U3.1 | length 1046.6
  Bottom Layer w20: U3.1 1299.5,1712.5 1589,2002 1589,2169 1604,2184 1761.38,2184 1833.93,2256.55 D10.1@1833.93,2339
IO0: U4.25 U6.3 | length 631.7
  Bottom Layer w15: U4.25 613.97,2268 883,2268 950.57,2200.43 U6.3
Ip5306_IRQ: U4.6 U9.4 | length 2315.7
  Top Layer w20: v1(1412,2668) 1462,2618 1462,1460.34 1440.92,1439.27 1440.92,542.08 1512,471 1569,471 v1@1571,469
  other v1: 1580,469
KEY1: C23.2 KEY1.1 R25.1 SW_P.2 U4.9 | length 4176.6
  Top Layer w20: SW_P.2@389.12,576 389.67,575.45 SW_P.2 405.97,576 460.79,576 ; v1(460.79,1132.21) 460.79,576 ; v1(1225,2523) 716,2523 670,2477 670,1000.16 626.5,956.66 626.5,796.27 676,746.77 676,331.72 650.28,306 556,306 542,320 542,438.87 460.79,520.08 460.79,576
  Bottom Layer w20: KEY1.1 493.5,1135.95 496,1138.45 C23.2 R25.1 ; v1(1225,2523) 1226,2522 1358,2522 U4.9
KEY2: C10.2 D4.1 D8.1 KEY1.2 SW_W.2 U9.5 | length 2528.1
  Top Layer w20: v1(1117,403) 1117,405.71 1121,409.71 v1(1121,569) ; v1(1556,700.08) 1556,714.15 1569.62,727.78 SW_W.2
  Bottom Layer w20: KEY1.2 209.32,1175.32 170,1136 170,966.72 181.72,955 182.86,955 187.2,950.66 318.56,950.66 322.9,955 468,955 493.07,929.93 D4.1 493.07,747.79 506.69,734.17 546.69,734.17 626.93,653.94 D8.1 ; D8.1@625.43,648.5 D8.1 ; v1(1117,403) 1391.5,403 1466,477.5 C10.2 1466,482.5 1468.5,485 1489,485 1556,552 v1(1556,700.08) 1568.16,687.91 1597.45,687.91 1598,688.46 U9.5 ; v1(1121,569) 707.93,569 644.49,632.44 640.55,632.44 626.93,646.06 D8.1
KEY2IN: D4.2 R3.1 U4.10 | length 2410.1
  Top Layer w20: v1(657.5,841) 728,911.5 728,2389 808,2469 v1(1221,2469)
  Bottom Layer w20: R3.1 592,788.87 626.93,753.94 D4.2 ; R3.1@594,841 v1(657.5,841) ; v1(1221,2469) 1222,2470 1358,2470 U4.10
NET: R10.1 U3.41 | length 115.4
  Bottom Layer w20: R10.1 1092,1822.5 1114.6,1799.9 U3.41
NetC8_1: C8.1 R2.2 R5.1 U1.5 | length 301.9
  Bottom Layer w20: R5.1 1653.54,1411 ; C8.1 R2.2 1653.54,1411 ; U1.5 1653.6,1410.94 1653.54,1411
NetC18_1: C18.1 R8.2 R15.1 U2.5 | length 243.7
  Bottom Layer w20: C18.1 1746,2532.5 1752.6,2539.1 U2.5
NetC27_1: C27.1 D7.1 | length 116
  Bottom Layer w20: D7.1 133,2146 135.5,2146 138,2143.5 C27.1
NetC28_1: C28.1 R32.1 | length 197.4
  Bottom Layer w20: C28.1 1910.16,637.5 1878,605.34 1878,506.5 1912,472.5 R32.1
NetC33_1: C33.1 C34.2 R34.1 U9.6 | length 379.6
  Bottom Layer w20: C34.2 C33.1 1466.09,742.09 1636.28,742.09 1648,730.37 U9.6
NetD3_2: D3.2 R16.2 | length 663.9
  Bottom Layer w20: R16.2 132,2948.08 132,3462 D3.2
NetD7_2: D7.2 F2.2 P4.1 U8.1 | length 2185.9
  Top Layer w20: v1(116,548) 116,556 119,559 119,2215 142,2238 v1(209,2238)
  Bottom Layer w20: D7.2 192.66,2222 208.66,2238 v1(209,2238) ; P4.1 P4.1@224.95,720.15
  Bottom Layer w30: F2.2@53.45,508.62 F2.2 62.07,503.94 105.13,547 143.05,547 147.05,551 201.63,551 219.2,568.57 P4.1
NetD8_2: D8.2 Q1.3 R23.1 R26.2 R29.2 | length 629.5
  Bottom Layer w20: R29.2 307.5,742 305,744.5 305,747 294,758 294,869 318.65,893.65 380.28,893.65 392,881.94 R23.1
  Bottom Layer w30: R23.1 410,822 R26.2 442.02,709.98 442.02,704.99 493.07,653.94 D8.2 501.69,641.38 501.69,629.81 559.5,572 Q1.3
NetD9_1: D9.1 F2.1 Q2.1 Q2.3 R23.2 | length 823.6
  Bottom Layer w30: D9.1 60.73,402.34 115.34,402.34 133,420 133,485 135.44,487.44 168.31,487.44 ; F2.1@176.93,483 289,483 ; Q2.1 267.6,563.01 267.6,504.4 272,500 289,483 ; R23.2 365,803 Q2.3 362.4,563.01 362.4,501.98 343.43,483 289,483
NetL1_1: L1.1 U1.3 | length 94.6
  Bottom Layer w20: L1.1 1805.75,1610.95 1817.4,1599.29 U1.3
NetL2_1: L2.1 U2.3 | length 143.5
  Bottom Layer w39.37: 1843,2889 1849.05,2895.05 L2.1
NetL3_1: L3.1 U9.7 | length 156.1
  Bottom Layer w20: U9.7 1698,757.26 1732.05,791.32 L3.1@1732.05,842.5
NetLED1_1: LED1.1 R10.2 | length 94.2
  Bottom Layer w20: LED1.1 934.76,1825.5 1027.5,1825.5 R10.2
NetP4_2: P4.2 P4.3 P4.4 | length 349.2
  Bottom Layer w20: P4.4 120.78,757 ; P4.3 120.78,757 ; P4.2 127.4,763.62 120.78,757
NetQ1_1: Q1.1 R30.1 R31.2 | length 156.7
  Bottom Layer w30: R31.2 591,403 597.5,409.5 Q1.1
NetQ2_2: Q2.2 R29.1 | length 115.9
  Bottom Layer w20: R29.1 312.5,678 315,675.5 Q2.2
NetQ2_4: Q2.4 R26.1 | length 115.9
  Bottom Layer w20: R26.1 412.5,678 415,675.5 Q2.4
NetQ3_1: Q3.1 R38.1 | length 178.2
  Bottom Layer w20: R38.1 1557,2275 1586,2304 1586,2334 Q3.1@1630,2378
NetR7_2: R7.2 R9.1 U2.1 | length 286.2
  Bottom Layer w20: U2.1 1753.42,2888.22 1753.42,2851.29 1766.72,2838 R9.1 R7.2
NetR16_1: R16.1 U4.37 | length 439.5
  Bottom Layer w30: R16.1 412.02,2940 481.02,2871 U4.37
NetR28_2: R28.2 U7.3 | length 257.1
  Bottom Layer w20: R28.2@65,2061 66,2060 R28.2 70,2062.5 100.78,2093.28 161.28,2093.28 178,2110 178,2143 191.4,2156.4 U7.3
NetR33_2: R33.2 U4.14 | length 101.4
  Bottom Layer w20: U4.14 1359.5,2271.5 1459.5,2271.5 R33.2
NetRF1_1: RF1.1 U3.32 | length 359.4
  Bottom Layer w20: RF1.1 311.23,1563.15 670.45,1563.15 U3.32
NetU8_2: U8.2 Y1.1 | length 83.4
  Bottom Layer w20: Y1.1@131,2310 U8.2
NetU8_3: U8.3 Y1.2 | length 151.9
  Bottom Layer w20: Y1.2 103,2371.4 113.48,2360.92 213.47,2360.92 U8.3
OLED_SCL: OLED1.3 R17.1 R41.1 U4.36 U9.2 | length 5758.6
  Top Layer w20: OLED1.3 1036,3382 1088,3434 1696,3434 1727,3403 1727,3191 1672,3136 1672,2913 1727,2858 1727,1829 1667,1769 1667,1577 1727,1517 1727,1217.23 1518.92,1009.15 1518.92,693.08 1546.15,665.85 1682.92,665.85 1727,621.77 1727,439.71 1698,410.71 v1(1698,408)
  Bottom Layer w20: U4.36 615.97,2816 651,2816 663.72,2828.72 665.72,2828.72 666.34,2829.34 666.34,2954.66 644,2977 585.72,2977 574,2988.72 574,3475 574.37,3475.37 618,3475.37 ; R41.1 618,3475.37 ; R17.1 1022,3312.5 1028.53,3319.03 1028.53,3370.53 OLED1.3 1036,3444.6 1005.24,3475.37 618,3475.37 ; v1(1698,408) U9.2
OLED_SDA: OLED1.4 R18.1 R20.1 U4.33 U9.3 | length 6007.9
  Top Layer w20: v1(984.61,3433.14) 984,3432.53 984,3337 1002,3319 1077,3319 OLED1.4 1669,3378 1699,3348 1699,3206 1643,3150 1643,2896 1699,2840 1699,1842.73 1641,1784.73 1641,1563 1699,1505 1699,1226 1492.92,1019.92 1492.92,682.31 1535.38,639.85 1672.15,639.85 1699,613 1699,459.5 v1(1647,407.5)
  Bottom Layer w20: U4.33 666,2671 699,2704 699,2972 665,3006 611.72,3006 600,3017.72 600,3403 636,3439 978.76,3439 v1(984.61,3433.14) ; R18.1 1162,3312.5 1143.47,3331.03 1143.47,3374 1149.47,3380 1149.47,3389.47 1382,3622 R20.1 ; v1(1647,407.5) U9.3@1647,471
RST/EN: C36.2 R19.2 SW_R.1 U4.3 U6.6 | length 2775.9
  Top Layer w20: SW_R.1 835.04,1964 904.04,2033 1059,2033 v1(1065,2027)
  Bottom Layer w15: U6.6 1021.81,1886.79 1044.43,1886.79 1064,1906.35 1064,2404
  Bottom Layer w20: 1064,2404 1178,2518 1178,2791 1208,2821 U4.3 1496,2821 1552,2765 1554.5,2765 1557,2762.5 R19.2 C36.2
RTS: U5.14 U6.1 U6.5 | length 1614.8
  Bottom Layer w12: U5.14@190,2746 153,2709 153,2681 165,2669 269,2669 294,2644 294,2087 494.59,1886.41 U6.1 952.44,1888.29 973.29,1888.29 995.13,1910.13 1019.56,1910.13 U6.5
S_C: CN1.C3 D2.1 R14.2 | length 319.4
  Bottom Layer w10: D2.1 803.59,751.41 821,734 908,734 ; CN1.C3 908.94,733.06 908,734 ; R14.2 954.5,761.5 927,734 908,734
S_D: CN1.C7 D2.6 R11.1 | length 529.1
  Top Layer w10: v1(812,875) 812,678 824,666 854,666 v1(857,663)
  Bottom Layer w10: D2.6 803.59,843.59 806.46,840.72 848.06,840.72 862.44,826.34 1027,826.34 R11.1
S_R: CN1.C2 D2.5 R12.2 | length 444.5
  Bottom Layer w10: D2.5 778,825 788,815 819.4,815 824.06,810.34 871.66,810.34 ; R12.2 880.36,785.84 872.86,793.34 872.86,809.14 871.66,810.34 ; CN1.C2 1008.94,760.84 991.5,778.29 991.5,791.9 973.06,810.34 871.66,810.34
SIM_CLK: R14.1 U3.16 | length 198.9
  Bottom Layer w10: R14.1 957,849.84 964.5,857.34 964.5,859.84 1027.6,922.94 U3.16
SIM_DATA: C14.2 R11.2 U3.15 | length 241.8
  Bottom Layer w10: R11.2 1027.92,848.92 1072,848.92 ; U3.15 1070.9,850.02 1072,848.92 ; C14.2 1098.58,848.92 1072,848.92
SIM_RST: R12.1 U3.17 | length 211
  Bottom Layer w10: R12.1 884.5,849.84 984.3,949.64 U3.17
SIM_VDD: C13.2 CN1.C1 D2.4 U3.18 | length 882.2
  Top Layer w10: v1(903,945) 903,833 925,811 1168,811 v1(1170,809)
  Bottom Layer w10: D2.4 752.41,905.41 793,946 932,946 941,955 U3.18 ; CN1.C1 1108.94,645.88 1172,708.94 C13.2
SW_POWER: R30.2 U4.23 | length 1863.4
  Top Layer w20: v1(557,2171) 557,741 628,670 v1(628,337)
U0RXD: U4.34 U5.2 | length 347.8
  Bottom Layer w10: U5.2 392,2795 381,2784 381,2732 392,2721 U4.34
  Bottom Layer w20: U4.34@610.47,2721.5 U4.34
U0TXD: U4.35 U5.3 | length 184.7
  Bottom Layer w10: U5.3 545,2745 571,2771 U4.35
VBAT: C20.1 C33.2 D9.2 L3.2 Q2.5 Q2.6 Q2.7 Q2.8 R7.1 R34.2 R35.2 U2.4 | length 4501.6
  Top Layer w40: v1(1817.62,862) v1(1944,862)
  Bottom Layer w20: U2.4 1827.4,2762.08 1898.98,2690.5 1907.5,2690.5 R7.1 ; R7.1@1902,2689 C20.1 C20.1@1904.5,2601
  Bottom Layer w30: 142,301 142,303.48 168.31,329.78 168.31,353 ; D9.2@176.93,402.34 168.31,393.72 168.31,353 ; L3.2 1446,867 1400,821 C33.2 1398.16,738.16 1398.16,713.75 1405,706.91 1405,666.84 R34.2 1394.16,656 1277,656 915,294 456.28,294 415,335.28 Q2.5 413.61,353 265,353 168.31,353
  Bottom Layer w35: 1947.33,2610.68 1948.3,910 1948.33,862 v1@1948.35,814
  Bottom Layer w40: L3.2 1615.6,868.65 1615.6,952.6 1638,975 1783.19,975 1817.62,940.57 v1(1817.62,910) v1(1817.62,862) v1@1817.62,821
  other v1: 1817.62,814 1944,814 1944,910
VBUS: F1.1 P3.A4 P3.A9 P3.B4 P3.B9 TYP2.A9 TYP2.B9 | length 1465.2
  Top Layer w25: TYP2.A9 1701.43,122.76 1701.43,59.57 v1(1702,59) v1(1753.25,59) v1(1804.49,59) 1819.14,73.64 TYP2.B9
  Bottom Layer w15: 894,18 895,17 895,-41 954,-100 1026,-100 1083,-43 1083,19
  Bottom Layer w25: 1083,19 1083,39 1093,49 1476,49 1504,21 1664,21 v1(1702,59) 1702,160 1633.07,228.93 F1.1
VCC3V3: C15.2 C17.1 C18.2 C19.2 C24.1 CN2.2 CN3.2 D3.1 L2.2 OLED1.2 R3.2 R8.1 R13.1 R17.2 R18.2 R19.1 R21.2 R25.2 R38.2 R43.2 U4.2 | length 8505.1
  Top Layer w30: v1(602,976) 602,2784 602,3284 635,3317 875,3317 OLED1.2
  Bottom Layer w15: D3.1 181,3611 526,3611 560,3645 560,3879 585,3904 670,3904 682,3892 R43.2
  Bottom Layer w20: R18.2 1098,3262 1100,3260
  Bottom Layer w30: D3.1 D3.1@134.07,3560 ; R3.2 528,905 598,975 598,1222 596,1220 R25.2 ; R43.2 835,3850 843,3842 ; CN2.2@843,3822.56 857.44,3822.56 CN2.2@870,3810 ; CN3.2 870,3861.57 CN2.2@870,3810 ; C19.2 936,3310 ; OLED1.2@930.44,3383.56 OLED1.2 936,3310 ; 940,3310 936,3310 ; U4.2 1361.72,2873.72 1582.36,2873.72 C17.1 ; C24.1 1456,3006 ; R38.2 1681.95,2230 1796,2344.05 1796,2419 R13.1 1807,2476 ; L2.2 1620,3030 1600,3010 ; CN2.2@870,3810 882.56,3797.44 925.44,3797.44 941.44,3781.44 1147.44,3781.44 1237.5,3871.5 1239,3870 R21.2 1318,3890 1334,3906 1431,3906 1446,3891 1446,3268 1454,3260 ; 936,3310 936,3277.57 953.57,3260 1100,3260 1454,3260 ; 1454,3260 1454,3008 1456,3006 ; 1456,3006 1596,3006 1600,3010 ; C17.1 1593.48,2880 1621,2852.48 R19.1 1680,2760 1700,2740 1700,2488 1712,2476 1807,2476 ; C17.1 1600,2891.35 1600,3010 ; 1807,2476 1807,2605 R8.1 C18.2@1812,2532 ; C18.2@1812,2532 1812,2498 1810,2500 C18.2 C18.2@1812,2532
VCC_UART: C21.1 C22.1 C26.1 U5.4 U5.16 U7.5 | length 1296.6
  Bottom Layer w25: C22.1 85,2804 ; C26.1 85,2804 ; 340,2116.14 340,2710 ; 340,2115.14 373.55,2081.6 U7.5 384.57,2081.6 387.97,2085 C21.1 ; U5.4 436.31,2694.31 394.31,2694.31 390,2690 360,2690 340,2710 ; 85,2804 85,2830.36 99.64,2845 U5.16 295,2845 340,2800 340,2710
pads on no net: CN1.C6 CN2. CN3. CN3.5 CN3.7 D2.3 P3. P3.A5 P3.A8 P3.B5 P3.B8 SW_P.1 SW_P.3 SW_W.1 SW_W.3 TYP2.A5 TYP2.B5 U3.3 U3.4 U3.5 U3.6 U3.7 U3.9 U3.10 U3.11 U3.12 U3.14 U3.20 U3.22 U3.23 U3.24 U3.25 U3.26 U3.28 U3.29 U3.38 U3.40 U3.42 U4.7 U4.16 U4.17 U4.18 U4.19 U4.20 U4.21 U4.22 U4.24 U4.27 U4.28 U4.32 U5.7 U5.8 U5.9 U5.10 U5.11 U5.12 U5.15 U7.4 U8.8
copper on no net:
  other v2: 596.38,134.08 1381.38,134.08 404.62,3544.06
  other v3: 1584.62,3544.06

## Polygon pours and split planes (outlines as drawn)
GND on Bottom Layer "BOTTOM" (solid, shelved, pour order 0): 103,3663 104,3662 510,3662 510,3936 1481,3936 1482,3935 1482,3663 1866,3663 1979,3550 1979,42 1932,-5 1386,-5 1385,-6 1385,-235 1348,-272 632,-272 593,-233 593,-7 594,-6 589,-1 42,-1 1,40 1,971 2,970 91,970 91,1417 90,1418 2,1418 2,3549
GND on Top Layer "BOTTOM" (solid, shelved, pour order 6): 99,3663 510,3663 509,3664 509,3938 1482,3938 1482,3664 1870,3664 1980,3554 1980,35 1939,-6 1390,-6 1386,-10 1386,-240 1356,-270 1353,-267 616,-267 616,-261 594,-239 594,2 32,2 -2,36 -2,973 88,973 89,972 89,1416 1,1416 0,1415 0,3562 100,3662

## Keep-outs
Keep-Out Layer:
  lines w0.5: 296.37,3456.74 ccw(c297.35,3457.23) 296.37,3456.74 ; 296.37,3456.74 ccw(c297.35,3457.23) 296.37,3456.74 ; 1674.32,3456.74 ccw(c1675.3,3457.23) 1674.32,3456.74 ; 1674.32,3456.74 ccw(c1675.3,3457.23) 1674.32,3456.74 ; 986.08,3456.74 ccw(c987.06,3457.72) 986.08,3456.74 ; 1674.32,3234.03 ccw(c1675.3,3234.03) 1674.32,3234.03
  lines w10: 594,-239 594,-6 594,-239

## Other copper
Top Layer:
  rectangle net VBUS: 1687,19 1831,80
  rectangle net VBAT: 1797,785 1961,929
  pour cut-out: 1577,969 1577,757 1771.08,757 1770.92,969.97
  pour cut-out: 1704,1776.75 1898,1776.75 1898,1565.75 1703,1565.75 1702,1564.75
  pour cut-out: 1890,3135 1698,3135 1698,2923 1888,2923
  pour cut-out: -181.85,2314.86
  pour cut-out: 300,3478.45 300,2981 1680,2981 1680,3468.8
Bottom Layer:
  rectangle net NetL1_1: 1803,1531 1837,1614
  rectangle net 5V: 1740,380 1797,499
  rectangle net VBUS: 1688,34 1831,79
  rectangle net +5V: 1731,670 1796,741
  rectangle net VBAT: 1840,2583 1965,2732
  rectangle net VBAT: 1804,2719 1863,2811
  rectangle net VBUS: 1071,-33 1095,28
  rectangle net VBUS: 882,-33 906,28
  pour cut-out: 1771.04,757 1577.04,757 1577.04,968.5 1771.04,968.5
  pour cut-out: 1704,1776.75 1898,1776.75 1898,1565.25 1704,1565.25
  pour cut-out: 1697,3136.75 1891,3136.75 1891,2925.25 1697,2925.25
  pour cut-out: 300,3479.46 300,2983 1680,2983 1680,3469.81

## Silkscreen, mask and mechanical layers (free items; w line width, h text height)
Top Overlay:
  circle w10: c1584.62,3544.06 r104.21
  circle w10: c404.62,3544.06 r104.21
  circle w10: c596.38,134.08 r104.21
  circle w10: c1381.38,134.08 r104.21
  lines w5: 98.7,3524.68 256.18,3524.68 256.18,3575.86 98.7,3575.86 98.7,3524.68 ; 316.5,2320.73 1674.77,2320.73 1674.77,3230.03 316.5,3230.03 316.5,2320.73 ; 416.5,2568.62 1574.77,2568.62 1574.77,3147.36 416.5,3147.36 416.5,2568.62
  lines w39.37: 1929.57,75.08 1929.57,99.08
  text "BWL-1.3V" at 765,2128 h60
Mechanical 1:
  lines w10: 1.34,3539.82 cw(c150,3520) 104.78,3663 512,3663 512,3937 1479.93,3942.39 ; 2,3539.82 2,1417 93,1419 92,972 ; 91.46,970.59 0.41,970.59 0,971 1,185.75 1,50 ccw(c51,50) 51,0 171,0 ; 120.95,0.05 593.57,0.05 593.57,-230.57 ; 593,-221 ccw(c643,-221) 643,-271 ; 633.94,-270.94 1342.06,-270.94 ; 1335,-271 ccw(c1335,-221) 1385,-221 ; 1384.91,-228.09 1384.91,-3.92 1924.42,-3.92 ccw(c1924.42,50.13) 1978.47,50.13 1978.47,3565 ; 1481,3664 1481,3940 ; 1483,3662 1858,3662 cw(c1838.18,3513.34) 1979.28,3564.18

## Text inside footprints (layer, text, board x,y; h text height)
CN1: Bottom Overlay "OPEN" at 1168.17,242.25 h19.68 r270; Bottom Overlay "LOCK" at 785.18,242.26 h19.68 r270